# Altium PCB MopMe_PCB.PcbDoc
Units mm, origin at the board's own origin, x right, y up, seen from the top; angles counter-clockwise.
Board outline 68 x 70 mm, 2 copper layers (Top Layer, Bottom Layer), stack 0.936 mm thick; 25 components, 26 nets, 94 pads, 16 vias.
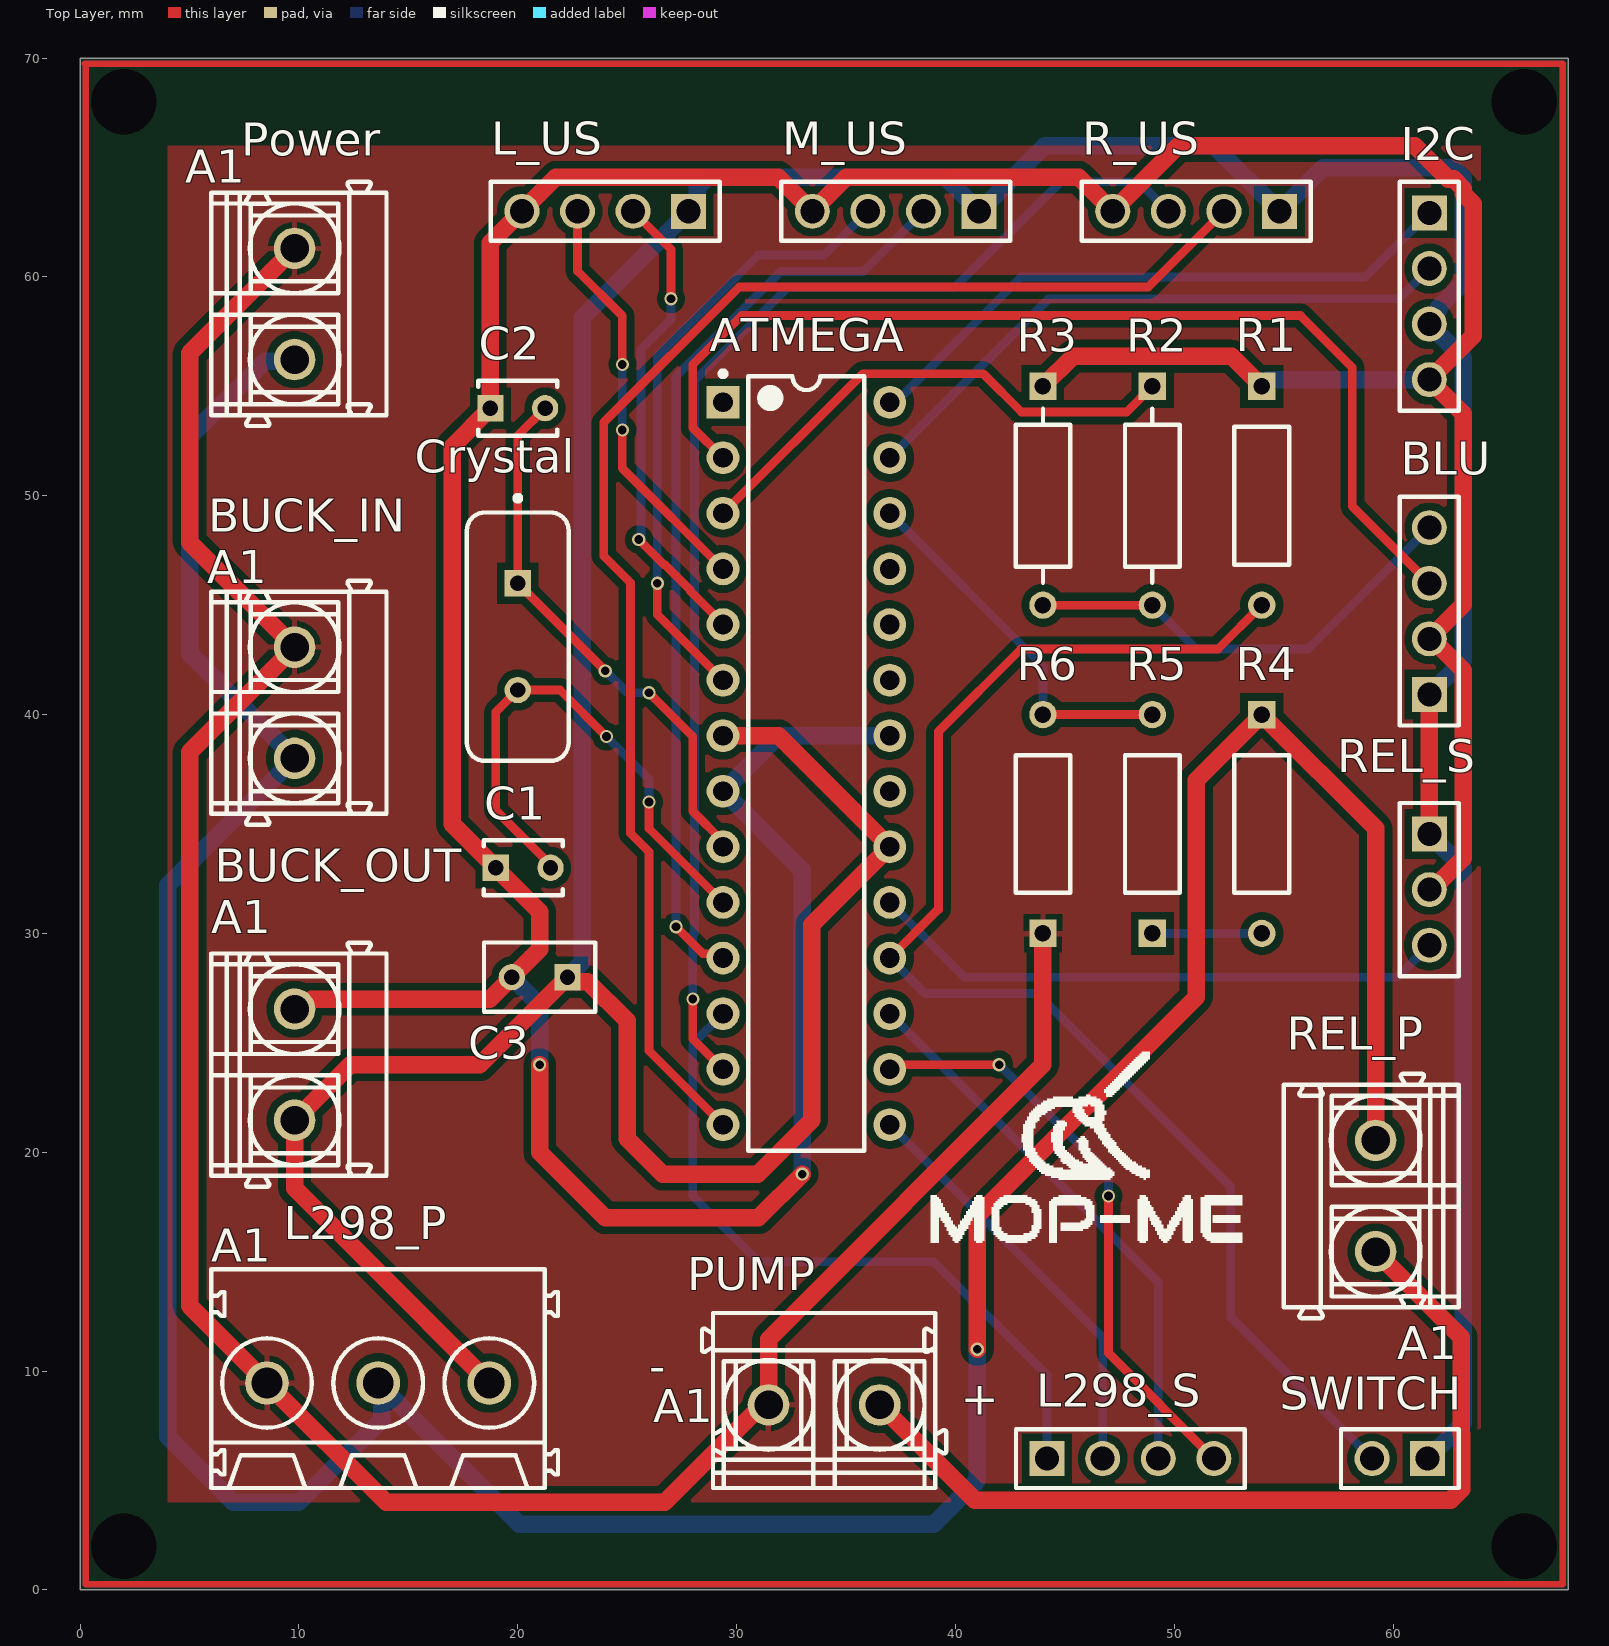
[diagram p0: Top Layer view]
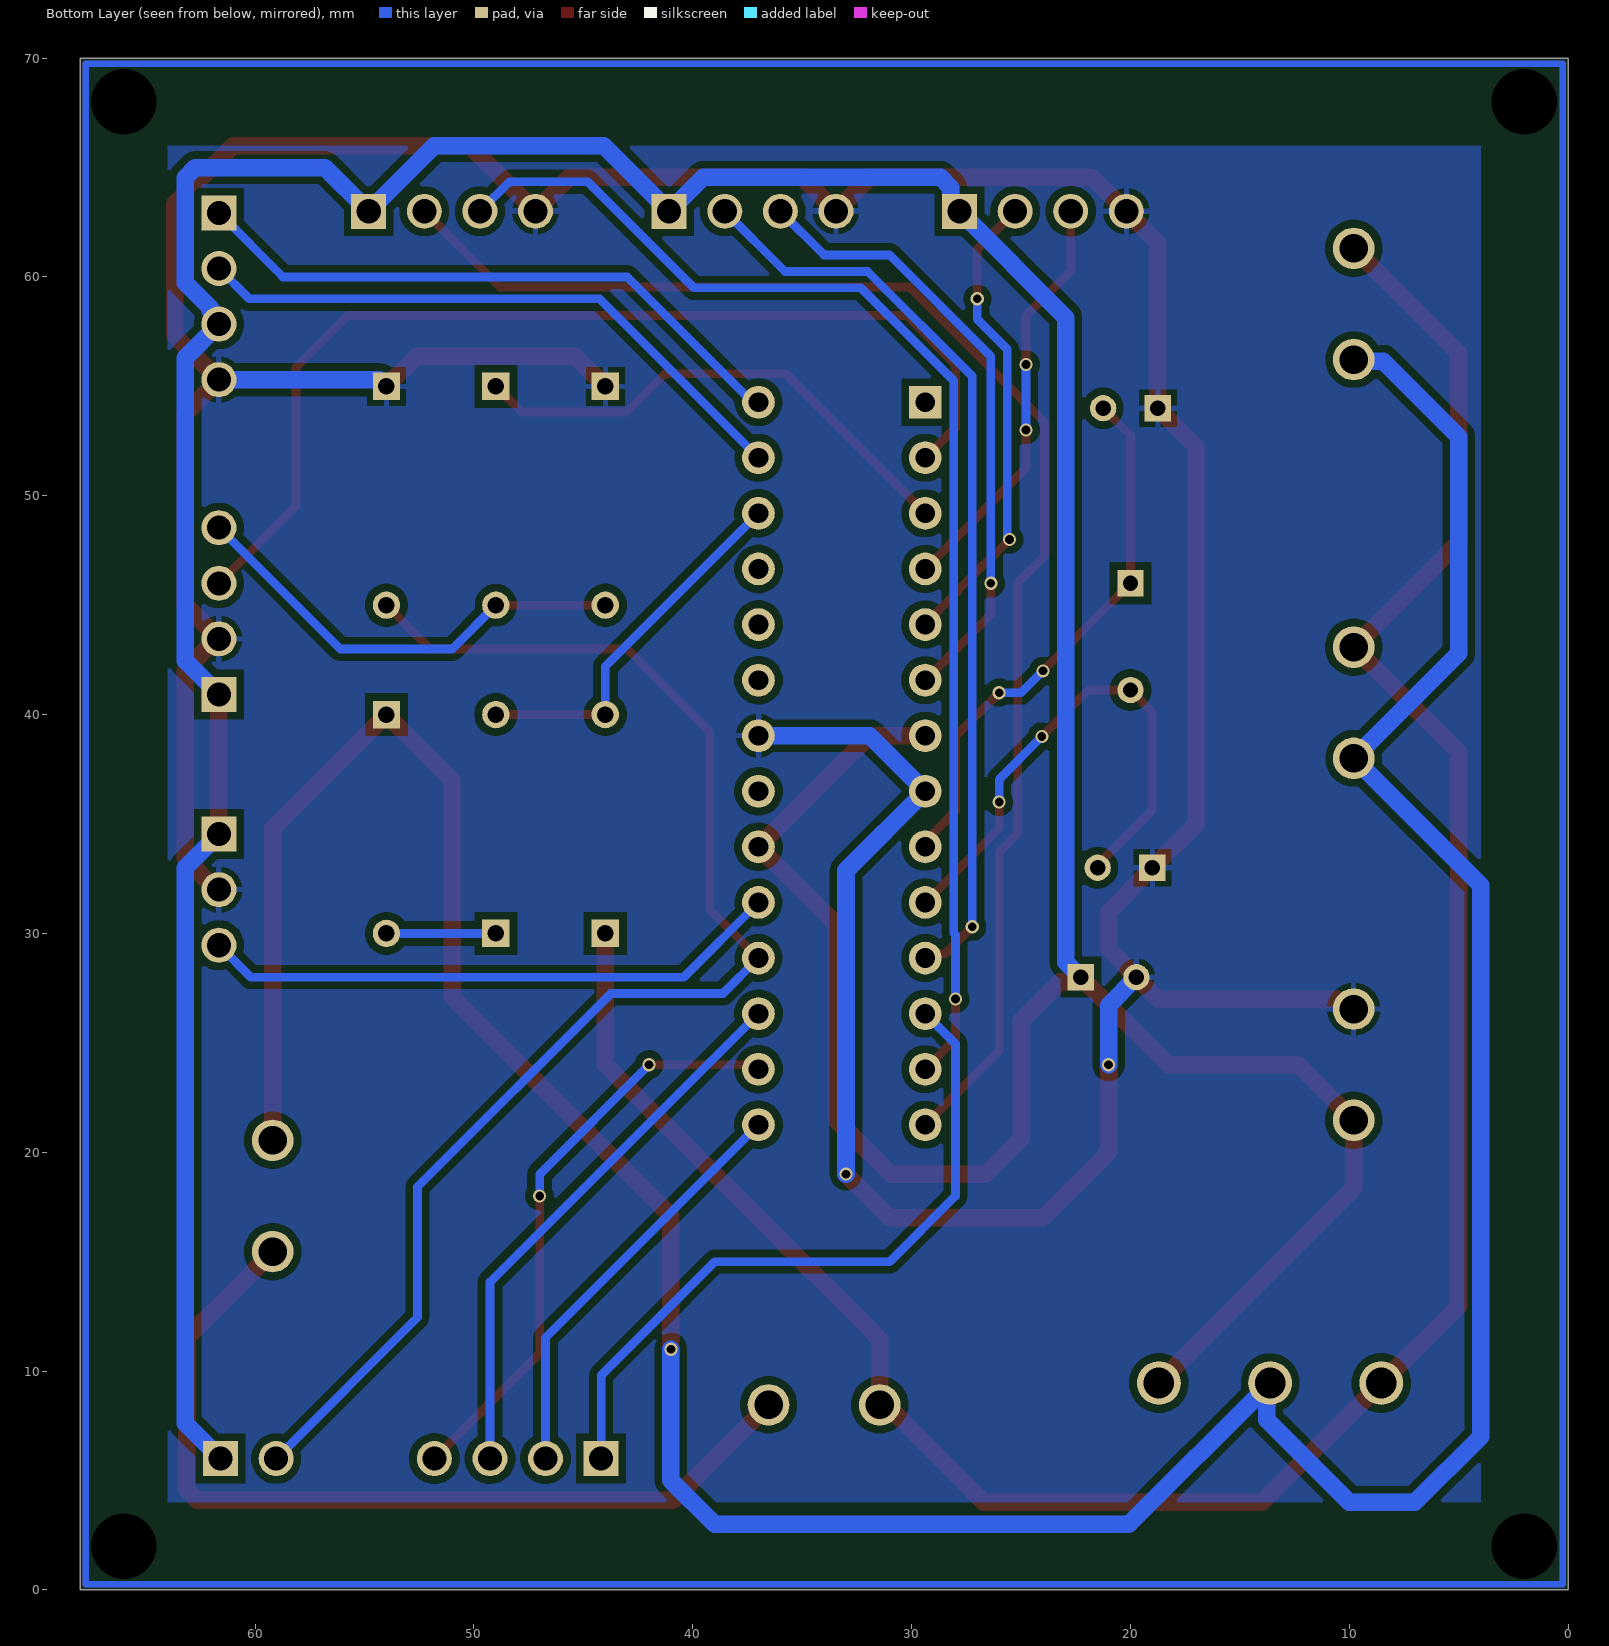
[diagram p1: Bottom Layer view, seen from below]
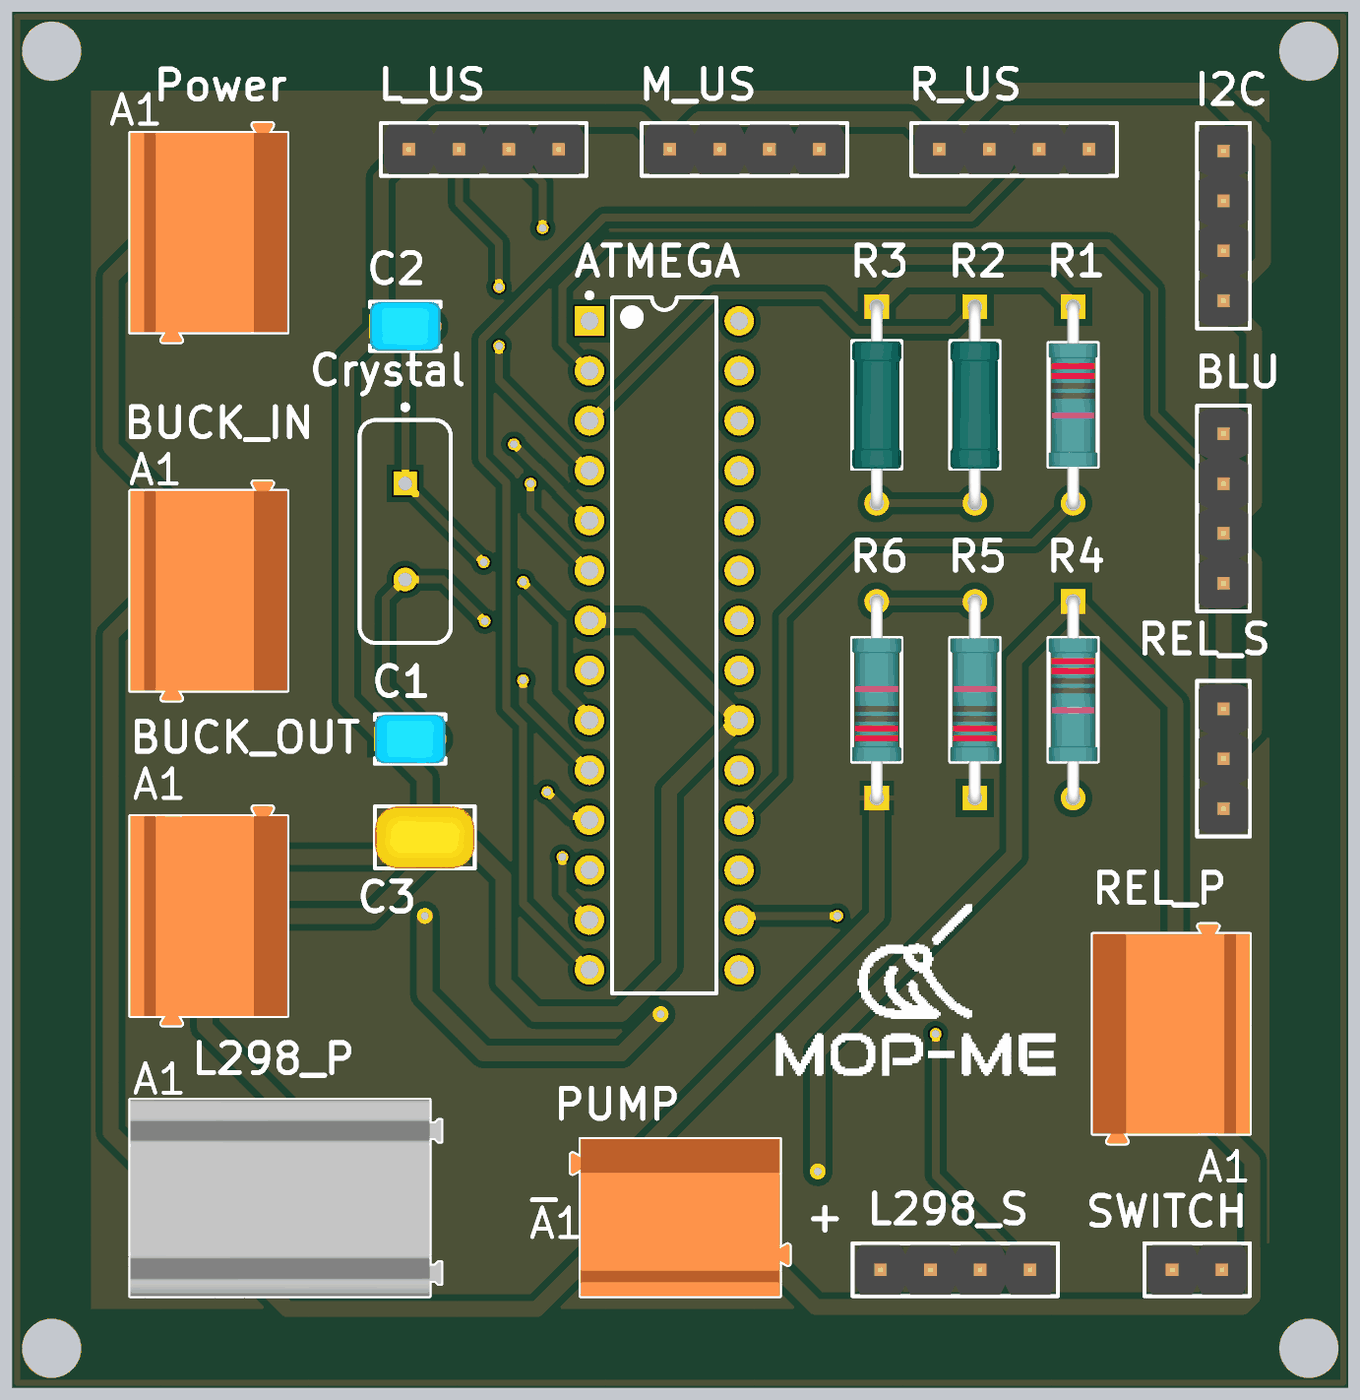
[diagram p2: 3D render of the assembled board from above, using the file's embedded part models]

## Layer stack, top to bottom
Top Solder: solder mask 0.05, SM-001, Dk 4
Top Layer: signal copper 0.018
Dielectric 1: dielectric 0.9, FR-4, Dk 4.8
Bottom Layer: signal copper 0.018
Bottom Solder: solder mask 0.05, SM-001, Dk 4

## Board outline
0,0 68,0 68,70 0,70

## Design rules (kind name [scope] priority, off if disabled: settings)
Clearance [All] p1: gap=0.35 ignorepadtopadclearanceinfootprint=FALSE
HoleSize [All] p1: absolutevalues=TRUE maxlimit=3.54 minlimit=0.025 maxpercent=80.000 minpercent=20.000
PolygonConnect [All] p1: connectstyle=Relief reliefconductorwidth=0.254 reliefentries=4 polygonreliefangle="90 Angle" airgapwidth=0.254
RoutingVias [All] p1: holewidth=0.4 width=0.6 viastyle="Through Hole" minholewidth=0.4 minwidth=0.6 maxholewidth=0.4 maxwidth=0.6
SilkToSilkClearance [All] p1: silktosilkclearance=0.1
SolderMaskExpansion [All] p1: expansion=0.102 istentingtop=FALSE
UnRoutedNet [All] p1: checkbadconnections=TRUE
Width Width_POW [(InNet('5V') OR InNet('5_GND') OR InNet('12V') OR InNet('12_GND') OR InNet('PUMP'))] p1: maxlimit=0.9 minlimit=0.7 preferedwidth=0.8
Width [All] p2: maxlimit=0.5 minlimit=0.3 preferedwidth=0.4
27 further rules are at their usual default settings.

## Components (designator, comment, footprint, x,y, rotation, side; value= is the part's Value field where it differs from the comment)
ATMEGA "ATmega328-PU" 28P3 33.19,37.765 r0 top
BLU "61300411121" 61300411121 61.655,44.73 r90 top
BUCK_IN "1760490000" PM_5_08_90_02 10,40.54 r270 top
BUCK_OUT "1760490000" PM_5_08_90_02 10,24 r270 top
C1 "22pF" FP-RCE0DB-MFG 20.25,33 r0 top
C2 "22pF" FP-RCE0DB-MFG 20,54 r0 top
C3 "100nF" FP-SR20-MFG 21,28 r180 top
Crystal "FOXSLF/160-20" FOX-FOXSLF160-20 20,43.56 r270 top
I2C "61300411121" 61300411121 61.655,59.115 r270 top
L298_P "1716090000" LM_5_08_90_03 13.62,9.655 r0 top
L298_S "61300411121" 61300411121 48,6 r0 top
L_US "61300411121" 61300411121 24,63 r180 top
M_US "61300411121" 61300411121 37.27,63 r180 top
Power "1760490000" PM_5_08_90_02 10,58.765 r270 top
PUMP "1760490000" PM_5_08_90_02 34,8.655 r0 top
R1 "10k" FP-MBB0207-MFG 54,50 r270 top
R2 "1k" FP-MRS25-MFG 49,50 r270 top
R3 "2k" FP-MRS25-MFG 44,50 r270 top
R4 "1M" FP-MBB0207-MFG 54,35 r270 top
R5 "1M" FP-MBB0207-MFG 49,35 r90 top
R6 "1M" FP-MBB0207-MFG 44,35 r90 top
R_US "61300411121" 61300411121 51,63 r180 top
REL_P "1760490000" PM_5_08_90_02 59,18 r90 top
REL_S "61300311121" 61300311121 61.655,32 r270 top
SWITCH "61300211121" 61300211121 60.31,6 r180 top

## Footprints (in the part's own frame and the unit in brackets; to place one, negate y for a bottom-side part, rotate by r counter-clockwise, add the part's x,y. Pads: shape width x height; smd on the part's side, far side on the other; paste and mask are expansions set on the pad)
28P3 [mm] "28-Pin Plastic Dual In-Line Package (PDIP)"
  rect 1.5x1.5 hole 0.9: 1(-3.81,16.51)
  round 1.5 hole 0.9: 2(-3.81,13.97) 3(-3.81,11.43) 4(-3.81,8.89) 5(-3.81,6.35) 6(-3.81,3.81) 7(-3.81,1.27) 8(-3.81,-1.27) 9(-3.81,-3.81) 10(-3.81,-6.35) 11(-3.81,-8.89) 12(-3.81,-11.43) 13(-3.81,-13.97) 14(-3.81,-16.51) 15(3.81,-16.51) 16(3.81,-13.97) 17(3.81,-11.43) 18(3.81,-8.89) 19(3.81,-6.35) 20(3.81,-3.81) 21(3.81,-1.27) 22(3.81,1.27) 23(3.81,3.81) 24(3.81,6.35) 25(3.81,8.89) 26(3.81,11.43) 27(3.81,13.97) 28(3.81,16.51)
  silkscreen extent -3.93,-17.7 2.65,17.93, body extent -3.6,-17.65 3.6,17.65, height 4.58
61300211121 [mm] "Pin Header, pitch 2.54 mm, THT, Vertical, single row, 2p"
  rect 1.6x1.6 hole 1.1: 1(-1.27,0)
  round 1.6 hole 1.1: 2(1.27,0)
  silkscreen extent -2.69,-1.35 2.69,1.34, body extent -2.54,-1.27 2.54,1.27, height 8.57
61300311121 [mm] "Pin Header, pitch 2.54 mm, THT, Vertical, single row, 3p"
  rect 1.6x1.6 hole 1.1: 1(-2.54,0)
  round 1.6 hole 1.1: 2(0,0) 3(2.54,0)
  silkscreen extent -3.96,-1.34 3.96,1.35, body extent -3.81,-1.27 3.81,1.27, height 8.57
61300411121 [mm] "Pin Header, pitch 2.54 mm, THT, Vertical, single row, 4p"
  rect 1.6x1.6 hole 1.1: 1(-3.81,0)
  round 1.6 hole 1.1: 2(-1.27,0) 3(1.27,0) 4(3.81,0)
  silkscreen extent -5.23,-1.35 5.23,1.34, body extent -5.08,-1.27 5.08,1.27, height 8.57
FOX-FOXSLF160-20 [mm] "THD, 2-Leads, Body 11.35x4.65mm"
  rect 1.2x1.2 hole 0.7: 1(-2.44,0)
  round 1.2 hole 0.7: 2(2.44,0)
  silkscreen extent -6.45,-2.33 5.68,2.33, body extent -5.67,-2.32 5.68,2.33, height 3.6
FP-MBB0207-MFG [mm]
  rect 1.25x1.25 hole 0.75 paste-1000 mask+0: 1(-5,0)
  round 1.25 hole 0.75 paste-1000 mask+0: 2(5,0)
  silkscreen extent -3.15,-1.25 3.15,1.25, body extent -5.72,-1.35 5.72,1.35, height 0.25
FP-MRS25-MFG [mm]
  rect 1.25x1.25 hole 0.75 paste-1000 mask+0: 1(-5,0)
  round 1.25 hole 0.75 paste-1000 mask+0: 2(5,0)
  silkscreen extent -3.97,-1.25 3.98,1.25, body extent -5.72,-1.35 5.72,1.35, height 0.25
FP-RCE0DB-MFG [mm]
  rect 1.2x1.2 hole 0.7 paste-1000 mask+0: 1(-1.25,0)
  round 1.2 hole 0.7 paste-1000 mask+0: 2(1.25,0)
  silkscreen extent -1.8,-1.25 1.8,1.25, body extent -1.95,-1.35 1.95,1.35, height 0.25
FP-SR20-MFG [mm]
  rect 1.2x1.2 hole 0.7 paste-1000 mask+0: 1(-1.27,0)
  round 1.2 hole 0.7 paste-1000 mask+0: 2(1.27,0)
  silkscreen extent -2.54,-1.59 2.54,1.59, body extent -2.64,-1.69 2.64,1.69, height 0.25
LM_5_08_90_03 [mm] "OMNIMATE Signal - Serie LM  LM 5.08/03/90 3.5"
  round 2 hole 1.4: A1(-5.08,-0.2) A2(0,-0.2) A3(5.08,-0.2)
  silkscreen extent -7.62,-5 8.22,5, body extent -7.62,-5 8.22,5, height 13.81
PM_5_08_90_02 [mm] "PM 5.08/02/90 3.5"
  round 1.9 hole 1.3: A1(-2.54,-0.2) A2(2.54,-0.2)
  silkscreen extent -5.58,-4 5.58,4, body extent -5.58,-4 5.58,4, height 10.01

## Part data
ATMEGA: library part CMP-0095-00015-2, "8-bit AVR Microcontroller, 32KB Flash, 1KB EEPROM, 2KB SRAM, 28-pin PDIP, Industrial Grade (-40°C to 85°C)", ComponentLink1Description="Manufacturer URL", ComponentLink1URL=http://www.atmel.com/, ComponentLink2Description="ATmega48A/48PA/88A/88PA/168A/168PA/328/328P Datasheet", ComponentLink2URL=http://www.atmel.com/dyn/resources/prod_documents/8271.pdf, ComponentLink3Description="ATmega48A/48PA/88A/88PA/168A/168PA/328/328P Summary", ComponentLink3URL=http://www.atmel.com/dyn/resources/prod_documents/8271S.pdf, DatasheetVersion="revD, May-2011", PackageDescription="28-lead (0.300\"/7.62mm Wide) Plastic Dual Inline Package (PDIP)", PackageReference=28P3, PackageVersion="revB, Sep-2001", RevisionNote="DatasheetVersion updated. URLs added."
BLU I2C L298_S L_US M_US R_US: library part CMP-1502-01064-1, "THT Vertical Pin Header WR-PHD, Pitch 2.54 mm, Single Row, 4 pins", Contact Resistance=20mOhm, Manufacturer="Wurth Elektronik", Operating Temperature=-40to105degC, Rated Current=3A, Withstanding Voltage=500VAC, Working Voltage=250VAC, Datasheet URL=https://katalog.we-online.de/em/datasheet/6130xx11121.pdf, Gender=Male, Manufacturer URL=http://www.we-online.de, Mounting Technology=THT, Orientation=Vertical, Package Reference=61300411121, Packaging=Bag, Part Number=61300411121, Pin Number=4, Pitch=2.54mm, Publisher=WurthElektronik, Row Number=Single
BUCK_IN BUCK_OUT Power PUMP REL_P: library part CMP-1559-01627-1, "OMNIMATE Signal - series PM", Colour=Orange, Manufacturer=Weidmueller, Rated_current_use_group_B_UL_1059="15 A", Rated_voltage_for_surge_voltage_class_pollution_degree_II_2="600 V", Rated_voltage_use_group_B_UL_1059="300 V", UL_94_flammability_rating=V-0, ComponentLink1Description="Manufacturer URL", ComponentLink1URL=http://www.weidmueller.com/, ComponentLink2Description="URL Link1", ComponentLink2URL=http://catalog.weidmueller.com/catalog/Start.do?localeId=en&ObjectID=1760490000, Contact_material=Cu-Leg, Contact_surface=tinned, Insulating_material="Wemid (PA)", Mounting_onto_the_PCB="Solder connection", No_of_poles=2, PackageReference=PM_5_08_90_02, Packaging=Box, PartNumber=1760490000, Pitch_inch="0,2 inch", Pitch_mm="5,08 mm", Qty="500 PCS", Revision=V1, Short_text_for_material="PM 5.08/02/90 3.5SN OR BX", Side_termination_characteristic="closed side", Solder_pin_length_mm="3,5 mm", Solid_max_H05_07_V_U="2,5 mm²", Solid_min_H05_07_V_U="0,13 mm²", Wire_cross_section_AWG_max_UL_1059="AWG 14", Wire_cross_section_AWG_min_UL_1059="AWG 26"
C1 C2: library part CMP-06035-057691-1, "Cap Ceramic 22pF 50V C0G ±5% Radial 2.5mm +125°C Ammo Pack", Case/Package=Radial, Dielectric=C0G, Max Operating Temperature=125°C, Min Operating Temperature=-55°C, Package Quantity=2000, Ratings=AEC-Q200, Resistor Type=Ceramic, Tolerance=5%, Voltage Rating=50V, Capacitance=22pF, Height=3.5mm, Height - Seated (Max)=0.138inch, Lead Diameter=0.5mm, Lead Pitch=0.098inch, Lead/Base Style=Straight, Length=0.142inch, Mount="Through Hole", Packaging="Tape and Reel", Termination=Radial, Voltage Rating (DC)=50V, Width=0.098inch
C3: library part CMP-04427-000013-1, "CAP CER 0.1UF 50V X7R RADIAL", Manufacturer=AVX, Manufacturer Part Number=SR205C104KAR, Package=SR20, Temperature="-55°C to +125°C", Temperature Characteristic=X7R, Temperature Range High=+125°C, Temperature Range Low=-55°C, Tolerance=10%, Voltage=50V, Automotive=No, Capacitance=100nF, Category=Cap, ComponentLink2Description=Datasheet, ComponentLink2URL=http://datasheets.avx.com/SR-Series.pdf, Device Class L1="Passive Components", Device Class L2=Capacitors, Device Class L3="Ceramic Capacitors", Digikey Description="CAP CER 0.1UF 50V X7R RADIAL", Height=5.08mm, Lead Free=Yes, Material=Ceramic, Mouser Description="Multilayer Ceramic Capacitors MLCC - Leaded 50volts 0.1uF 10% X7R", Octopart=https://octopart.com/sr205c104kar-avx-145048, RoHS=TRUE, Voltage Rating=50V
Crystal: library part CMP-1749-00003-1, "Resistance Weld Thru-Hole Crystal, 16 MHz, -20 to 70 degC, 2-Pin THD, RoHS, Bulk", Case\Package=Axial, Max Operating Temperature="155 degC", Min Operating Temperature="-55 degC", Package Quantity=200, Power Rating="250 mW", Resistance="221 kohm", Tolerance=1%, Voltage Rating="250 V", ComponentLink1Description="Manufacturer URL", ComponentLink1URL=http://www.foxonline.com/, ComponentLink2Description=Datasheet, ComponentLink2URL=http://www.foxonline.com/pdfs/hc49slf.pdf, DatasheetVersion=Mar-15, Length="0.248 inch", Mount="Through Hole", PackageDescription="2-Pin Through Hole Device, Body 11.35 x 4.65 mm", PackageReference=FOXSLF160-20, Packaging=Bulk, RoHSCompliant=true
L298_P: library part CMP-1559-01768-1, "OMNIMATE Signal - series LM", Colour=Orange, Manufacturer=Weidmueller, Rated_current_use_group_B_UL_1059="15 A", Rated_voltage_for_surge_voltage_class_pollution_degree_II_2="630 V", Rated_voltage_use_group_B_UL_1059="300 V", UL_94_flammability_rating=V-0, ComponentLink1Description="Manufacturer URL", ComponentLink1URL=http://www.weidmueller.com/, ComponentLink2Description="URL Link1", ComponentLink2URL=http://catalog.weidmueller.com/catalog/Start.do?localeId=en&ObjectID=1716090000, Contact_material=Cu-Leg, Contact_surface=tinned, Insulating_material="Wemid (PA)", Mounting_onto_the_PCB="Solder connection", No_of_poles=3, PackageReference=LM_5_08_90_03, Packaging=Box, PartNumber=1716090000, Pitch_inch="0,2 inch", Pitch_mm="5,08 mm", Qty="500 PCS", Revision=V1, Short_text_for_material="LM 5.08/03/90 3.5SN OR BX", Side_termination_characteristic="closed side", Solder_pin_length_mm="3,5 mm", Solid_max_H05_07_V_U="2,5 mm²", Solid_min_H05_07_V_U="0,2 mm²", Wire_cross_section_AWG_max_UL_1059="AWG 14", Wire_cross_section_AWG_min_UL_1059="AWG 24"
R1: library part CMP-02408-000035-1, "RES 10K OHM 0.6W 1% AXIAL", Case/Package=Conformal, Max Operating Temperature=155°C, Max Power Dissipation=600mW, Min Operating Temperature=-55°C, Resistance=10kR, Resistance Tolerance=1%, Resistor Type="Metal Film", Temperature Coefficient=50ppm/°C, Voltage Rating=300V, Construction=Cylindrical, Contact Plating=Tin, Diameter=2.5mm, Features="Automotive AEC-Q200", Lead Free="Lead Free", Length=6.5mm, Military Standard=Not, Number of Terminations=2, Packaging="Tape and Reel", Power Rating=600mW, Radiation Hardening=No, RoHS Compliant=Yes, Series="MBB 0207 - Professional", Technology="THIN FILM", Termination=Axial, Tolerance=1%, Voltage Rating (DC)=300V
R2: library part CMP-02408-000051-1, "RES 1K OHM 0.6W 1% AXIAL", Case/Package=Axial, Max Operating Temperature=155°C, Max Power Dissipation=600mW, Min Operating Temperature=-55°C, Package Quantity=5000, Resistance=1kR, Resistance Tolerance=1%, Resistor Type="Metal Film", Temperature Coefficient=50ppm/°C, Voltage Rating=350V, Construction=Cylindrical, Contact Plating=Tin, Diameter=2.5mm, Lead Diameter=0.6mm, Lead Free="Lead Free", Length=6.5mm, Military Standard=Not, Mount="Through Hole", Number of Pins=2, Number of Terminations=2, Packaging="Tape and Reel", Power Rating=600mW, Radiation Hardening=No, RoHS Compliant=Yes, Series=MRS25, Technology="THIN FILM", Termination=Axial, Tolerance=1%, Voltage Rating (DC)=350V, Weight=0.00776oz, Width=2.5mm
R3: library part CMP-02408-000051-1, "RES 1K OHM 0.6W 1% AXIAL", Case/Package=Axial, Max Operating Temperature=155°C, Max Power Dissipation=600mW, Min Operating Temperature=-55°C, Package Quantity=5000, Resistance=2kR, Resistance Tolerance=1%, Resistor Type="Metal Film", Temperature Coefficient=50ppm/°C, Voltage Rating=350V, Construction=Cylindrical, Contact Plating=Tin, Diameter=2.5mm, Lead Diameter=0.6mm, Lead Free="Lead Free", Length=6.5mm, Military Standard=Not, Mount="Through Hole", Number of Pins=2, Number of Terminations=2, Packaging="Tape and Reel", Power Rating=600mW, Radiation Hardening=No, RoHS Compliant=Yes, Series=MRS25, Technology="THIN FILM", Termination=Axial, Tolerance=1%, Voltage Rating (DC)=350V, Weight=0.00776oz, Width=2.5mm
R4 R5 R6: library part CMP-02408-000035-1, "RES 10K OHM 0.6W 1% AXIAL", Case/Package=Conformal, Max Operating Temperature=155°C, Max Power Dissipation=600mW, Min Operating Temperature=-55°C, Resistance=1MR, Resistance Tolerance=1%, Resistor Type="Metal Film", Temperature Coefficient=50ppm/°C, Voltage Rating=300V, Construction=Cylindrical, Contact Plating=Tin, Diameter=2.5mm, Features="Automotive AEC-Q200", Lead Free="Lead Free", Length=6.5mm, Military Standard=Not, Number of Terminations=2, Packaging="Tape and Reel", Power Rating=600mW, Radiation Hardening=No, RoHS Compliant=Yes, Series="MBB 0207 - Professional", Technology="THIN FILM", Termination=Axial, Tolerance=1%, Voltage Rating (DC)=300V
REL_S: library part CMP-1502-01062-1, "THT Vertical Pin Header WR-PHD, Pitch 2.54 mm, Single Row, 3 pins", Contact Resistance=20mOhm, Manufacturer="Wurth Elektronik", Operating Temperature=-40to105degC, Rated Current=3A, Withstanding Voltage=500VAC, Working Voltage=250VAC, Datasheet URL=https://katalog.we-online.de/em/datasheet/6130xx11121.pdf, Gender=Male, Manufacturer URL=http://www.we-online.de, Mounting Technology=THT, Orientation=Vertical, Package Reference=61300311121, Packaging=Bag, Part Number=61300311121, Pin Number=3, Pitch=2.54mm, Publisher=WurthElektronik, Row Number=Single
SWITCH: library part CMP-1712-00002-4, "THT Vertical Pin Header WR-PHD, Pitch 2.54 mm, Single Row, 2 pins", Contact Resistance=20mOhm, Manufacturer="Wurth Elektronik", Operating Temperature=-40to105degC, Rated Current=3A, Withstanding Voltage=500VAC, Working Voltage=250VAC, Datasheet URL=https://katalog.we-online.de/em/datasheet/6130xx11121.pdf, Gender=Male, Manufacturer URL=http://www.we-online.de, Mounting Technology=THT, Orientation=Vertical, Package Reference=61300211121, Packaging=Bag, Part Number=61300211121, Pin Number=2, Pitch=2.54mm, Publisher=WurthElektronik, Row Number=Single

## Free pads (board coordinates)
  round 1.524 hole 3: 2(66,68) 3(2,68) 4(2,2) 5(66,2)

## Via types
v1: diameter 0.6, hole 0.4, Top Layer to Bottom Layer, 16 vias

## Nets (pads, with @x,y where several pads share a name; then routed paths per layer and width w, separated by ;. In a path a pad name is that pad's centre, name@x,y a point inside that pad or via, vN(x,y) a via of type N, cw(c..) or ccw(c..) an arc to the next point about the centre after c; other vN are vias at no path point)
5_GND: ATMEGA.8 ATMEGA.22 BLU.2 BUCK_OUT.A1 C1.1 C2.1 C3.2 I2C.4 L_US.4 M_US.4 R1.1 R3.1 R_US.4 REL_S.2 | length 201.6
  Top Layer w0.8: BUCK_OUT.A1 10.098,26.54 10.558,27 18.73,27 21,29.27 21,31 C1.1 17,35 17,52.25 C2.1 18.75,61.56 L_US.4 21.74,64.55 31.91,64.55 M_US.4 35.01,64.55 45.64,64.55 R_US.4 50.19,66 61,66 62.525,64.475 62.766,64.475 63.205,64.036 63.205,63.795 63.664,63.336 63.664,57.314 I2C.4 63.205,53.755 63.205,45.01 BLU.2 61.776,43.46 63.205,42.031 63.205,33.429 61.776,32 REL_S.2 ; v1(21,24) 21,20 24,17 31,17 v1(33,19) ; R3.1 45.375,56.375 52.625,56.375 R1.1
  Bottom Layer w0.8: C3.2 19.73,27.994 21,26.724 v1(21,24) ; v1(33,19) 33,32.875 ATMEGA.8 31.92,39.035 ATMEGA.22 ; R1.1 54.305,55.305 I2C.4
5V: ATMEGA.7 ATMEGA.20 BLU.1 BUCK_OUT.A2 C3.1 I2C.3 L298_P.A3 L_US.1 M_US.1 R_US.1 REL_S.1 SWITCH.1 | length 213.3
  Top Layer w0.8: L298_P.A3 13.066,15.089 9.8,18.355 BUCK_OUT.A2 12.34,24 18.27,24 C3.1 22.47,27.8 23.2,27.8 25,26 25,20.626 26.626,19 30.965,19 33.434,21.469 33.434,30.389 ATMEGA.20 31.92,39.035 ATMEGA.7 ; REL_S.1 BLU.1
  Bottom Layer w0.8: C3.1 22.95,28.68 22.95,58.14 L_US.1 28.21,63.4 28.21,64.081 28.679,64.55 39.53,64.55 M_US.1 44.08,66 51.81,66 R_US.1 56.81,65 62.736,65 63.205,64.531 63.205,59.743 62.055,58.593 62.055,58.461 61.655,58.061 I2C.3 63.205,56.295 63.205,42.47 BLU.1 ; SWITCH.1 63.205,7.625 63.205,32.99 REL_S.1
12_GND: BUCK_IN.A1 L298_P.A1 Power.A1 PUMP.A1 R6.1 | length 113
  Top Layer w0.8: Power.A1 5,56.505 5,47.88 BUCK_IN.A1 5,38.28 5,12.995 L298_P.A1 13.995,4 26.707,4 31.162,8.455 PUMP.A1 31.46,11.46 44,24 R6.1
12V: BUCK_IN.A2 L298_P.A2 Power.A2 R4.1 REL_P.A2 | length 163.3
  Top Layer w0.8: v1(41,11) 41,17.09 51,27.09 51,37 R4.1 59.2,34.8 REL_P.A2
  Bottom Layer w0.8: Power.A2 9.72,56.145 8.44,56.145 5,52.705 5,42.8 BUCK_IN.A2 4,32.2 4,7 7,4 10,4 13.782,7.782 L298_P.A2@13.782,9.293 ; L298_P.A2 L298_P.A2@13.782,9.293 ; v1(41,11) 41,5 39,3 20.075,3 L298_P.A2@13.782,9.293
NetATMEGA_2: ATMEGA.2 BLU.3 | length 48.2
  Top Layer w0.4: ATMEGA.2 28,53.115 28,56 30.236,58.236 55.764,58.236 58.139,55.861 58.139,49.516 BLU.3
NetATMEGA_3: ATMEGA.3 R2.1 | length 23.5
  Top Layer w0.4: ATMEGA.3 35.76,55.575 41.268,55.575 43.018,53.825 47.825,53.825 R2.1
NetATMEGA_4: ATMEGA.4 L_US.3 | length 19.1
  Top Layer w0.4: L_US.3 22.73,60.27 24.78,58.22 v1(24.78,56) ; v1(24.78,53) 24.78,51.255 ATMEGA.4
  Bottom Layer w0.4: v1(24.78,53) v1(24.78,56)
NetATMEGA_5: ATMEGA.5 L_US.2 | length 21.8
  Top Layer w0.4: L_US.2 27,61.27 v1(27,59) ; v1(25.53,48) 26.68,46.85 26.732,46.85 27.885,45.697 27.885,45.645 29.38,44.15 ATMEGA.5
  Bottom Layer w0.4: v1(25.53,48) 25.63,48.1 25.63,56.691 27,58.061 v1(27,59)
NetATMEGA_6: ATMEGA.6 M_US.3 | length 28.4
  Top Layer w0.4: v1(26.38,46) 26.38,44.575 ATMEGA.6
  Bottom Layer w0.4: v1(26.38,46) 26.38,56.38 31,61 34,61 M_US.3
NetATMEGA_9: ATMEGA.9 C2.2 Crystal.1 | length 25
  Top Layer w0.4: C2.2 20,52.75 Crystal.1 v1(24,42) ; v1(26,41) 28,39 28,35.582 29.38,34.202 ATMEGA.9
  Bottom Layer w0.4: v1(24,42) 25,41 v1(26,41)
NetATMEGA_10: ATMEGA.10 C1.2 Crystal.2 | length 24.3
  Top Layer w0.4: C1.2 21.5,33.134 19,35.634 19,40.12 Crystal.2 21.93,41.12 v1(24.05,39) ; v1(26,36) 26,34.795 ATMEGA.10
  Bottom Layer w0.4: v1(24.05,39) 26,37.05 v1(26,36)
NetATMEGA_11: ATMEGA.11 M_US.2 | length 42.3
  Top Layer w0.4: v1(27.23,30.304) 28.465,29.069 29.186,29.069 ATMEGA.11
  Bottom Layer w0.4: v1(27.23,30.304) 27.23,55.463 32.017,60.25 35.79,60.25 M_US.2
NetATMEGA_12: ATMEGA.12 L298_S.1 | length 32.3
  Bottom Layer w0.4: ATMEGA.12 28,24.955 28,18 31,15 39,15 44.19,9.81 L298_S.1
NetATMEGA_13: ATMEGA.13 R_US.3 | length 58
  Top Layer w0.4: v1(28,27) 28,25.175 ATMEGA.13
  Bottom Layer w0.4: v1(28,27) 28,29.944 28.08,30.024 28.08,55.253 32.327,59.5 39.958,59.5 44.808,64.35 48.38,64.35 R_US.3
NetATMEGA_14: ATMEGA.14 R_US.2 | length 66.7
  Top Layer w0.4: ATMEGA.14 26,24.635 26,33.734 25.15,34.584 25.15,46.028 23.93,47.248 23.93,53.352 30.118,59.541 48.811,59.541 R_US.2
NetATMEGA_15: ATMEGA.15 L298_S.2 | length 19.3
  Bottom Layer w0.4: ATMEGA.15 46.73,11.525 L298_S.2
NetATMEGA_16: ATMEGA.16 L298_S.4 | length 27.1
  Top Layer w0.4: ATMEGA.16 37.205,24 v1(42,24) ; v1(47,18) 47,10.81 L298_S.4
  Bottom Layer w0.4: v1(42,24) 47,19 v1(47,18)
NetATMEGA_17: ATMEGA.17 L298_S.3 | length 25.4
  Bottom Layer w0.4: ATMEGA.17 49.27,14.065 L298_S.3
NetATMEGA_18: ATMEGA.18 R1.2 SWITCH.2 | length 63.4
  Top Layer w0.4: ATMEGA.18 39.222,31.097 39.222,39.222 43,43 52,43 R1.2
  Bottom Layer w0.4: ATMEGA.18 38.625,27.25 43.75,27.25 52.581,18.419 52.581,12.459 SWITCH.2
NetATMEGA_19: ATMEGA.19 REL_S.3 | length 26.7
  Bottom Layer w0.4: ATMEGA.19 40.415,28 60.195,28 REL_S.3
NetATMEGA_26: ATMEGA.26 R5.2 R6.2 | length 17.1
  Top Layer w0.4: R6.2 R5.2
  Bottom Layer w0.4: ATMEGA.26 44,42.195 R6.2
NetATMEGA_27: ATMEGA.27 I2C.2 | length 28.2
  Bottom Layer w0.4: ATMEGA.27 44.265,59 60.27,59 I2C.2
NetATMEGA_28: ATMEGA.28 I2C.1 | length 28.2
  Bottom Layer w0.4: ATMEGA.28 37.275,54.275 43,60 58.73,60 I2C.1
NetBLU_4: BLU.4 R2.2 R3.2 | length 20.8
  Top Layer w0.4: R3.2 R2.2
  Bottom Layer w0.4: R2.2 51,43 56.115,43 BLU.4
NetR4_2: R4.2 R5.1 | length 5
  Bottom Layer w0.4: R5.1 R4.2
PUMP: PUMP.A2 REL_P.A1 | length 41.1
  Top Layer w0.8: PUMP.A2 40.887,4.108 62.639,4.108 63.13,4.599 63.13,7.111 63.108,7.133 63.108,11.552 REL_P.A1
pads on no net: ATMEGA.1 ATMEGA.21 ATMEGA.23 ATMEGA.24 ATMEGA.25
copper on no net: | length 548.7
  Top Layer w0.3: 0.719,69.75 0.219,69.75 ; 0.219,69.75 0.25,69.75 ; 0.219,69.75 0.25,69.75 ; 0.219,69.75 0.25,69.75 ; 0.219,69.75 0.25,69.75 ; 0.219,69.75 67.75,69.75 67.75,0.25 0.25,0.25 0.25,69.75
  Bottom Layer w0.3: 0.25,0.25 0.25,69.75 67.75,69.75 67.75,0.25 0.25,0.25

## Polygon pours and split planes (outlines as drawn)
12_GND on Top Layer "12_GND_L01_P001" (solid, pour order 1): 4,66 64,66 64,4 4,4
5_GND on Bottom Layer "5_GND_L02_P002" (solid, pour order 2): 4,66 64,66 64,4 4,4

## Silkscreen, mask and mechanical layers (free items; w line width, h text height)
Top Overlay:
  drawing of 9 lines, arcs and shapes, not listed
  text "-" at 26,9.492 h1.52
  text "+" at 40.254,8 h1.52

## Text inside footprints (layer, text, board x,y; h text height)
BUCK_IN: Top Overlay "A1" at 5.8,46 h1.5
BUCK_OUT: Top Overlay "A1" at 6,30 h1.5
L298_P: Top Overlay "A1" at 6,15 h1.5
Power: Top Overlay "A1" at 4.8,64.305 h1.5
PUMP: Top Overlay "A1" at 26.198,7.66 h1.5
REL_P: Top Overlay "A1" at 60.2,10.54 h1.5